# Altium PCB Main_Board.PcbDoc (part 11 of 14)
Units mm, origin at the board's own origin, x right, y up, seen from the top; angles counter-clockwise.
Board outline 142 x 82 mm, 10 copper layers (L1_Top, L2_PWR1, L3_Sig1, L4_GND1, L5_Sig2, L6_Sig3, L7_GND2, L8_Sig4, L9_GND3, L8_Bottom), stack 1.71 mm thick; 299 components, 328 nets, 2329 pads, 2908 vias.
Unrouted connection lines stored in the file: 2.
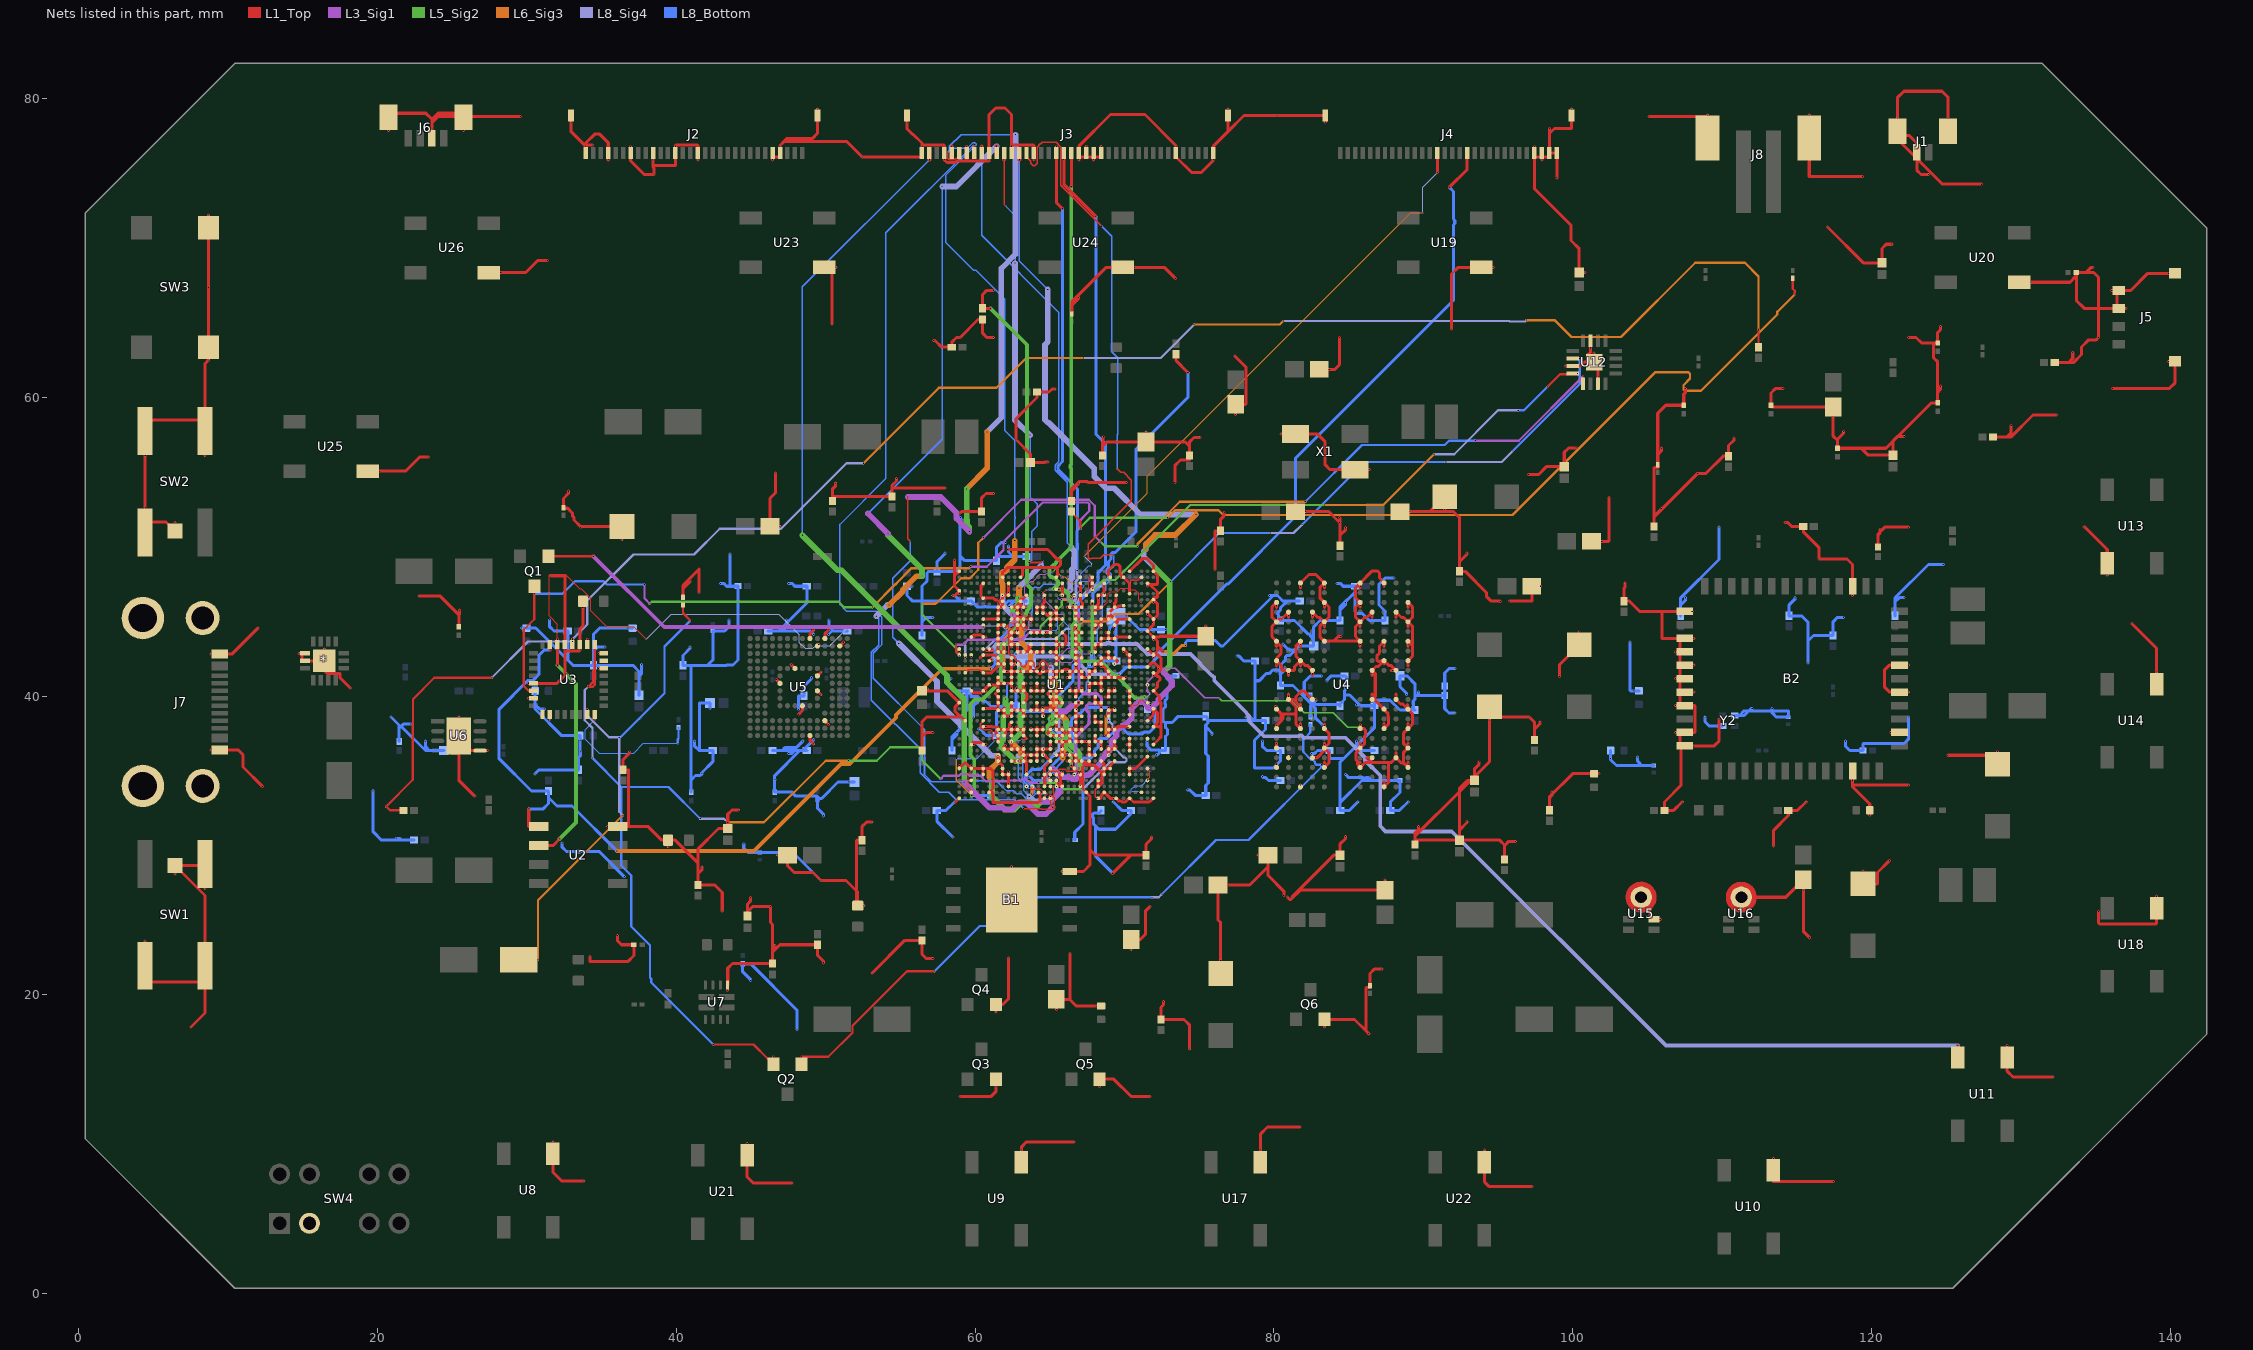
[diagram p18: the nets of this part, all layers, seen from the top]

## Via types
v1: diameter 0.1, hole 0.08, L1_Top to L8_Bottom, 1169 vias
v2: diameter 0.01, hole 0.01, L3_Sig1 to L8_Sig4, 433 vias
v3: diameter 0.01, hole 0.01, L8_Sig4 to L8_Bottom, 375 vias
v4: diameter 0.01, hole 0.01, L1_Top to L3_Sig1, 355 vias
v5: diameter 0.254, hole 0.01, L1_Top to L8_Bottom, 150 vias
v6: diameter 0.01, hole 0.01, L6_Sig3 to L8_Bottom, 129 vias
v7: diameter 0.05, hole 0.04, L1_Top to L8_Bottom, 104 vias
v8: diameter 0.01, hole 0.01, L1_Top to L5_Sig2, 89 vias
v9: diameter 0.01, hole 0.01, L1_Top to L8_Bottom, 41 vias
v10: diameter 0.1, hole 0.08, L1_Top to L3_Sig1, 17 vias
v11: diameter 0.1, hole 0.08, L1_Top to L5_Sig2, 11 vias
v12: diameter 0.1, hole 0.08, L8_Sig4 to L8_Bottom, 10 vias
v13: diameter 0.1, hole 0.08, L6_Sig3 to L8_Bottom, 9 vias
v14: diameter 1.27, hole 0.711, L1_Top to L8_Bottom, 8 vias
v15: diameter 0.4, hole 0.2, L1_Top to L8_Bottom, 4 vias
v16: diameter 0.05, hole 0.08, L1_Top to L8_Bottom, 3 vias
v17: diameter 0.05, hole 0.08, L6_Sig3 to L8_Bottom, 1 vias

## Nets (pads, with @x,y where several pads share a name; then routed paths per layer and width w, separated by ;. In a path a pad name is that pad's centre, name@x,y a point inside that pad or via, vN(x,y) a via of type N, cw(c..) or ccw(c..) an arc to the next point about the centre after c; other vN are vias at no path point) (continued)
GND: (continued)
  L1_Top w0.203: U4.E5@85.801,36.539 86.076,36.814 86.076,37.299 86.123,37.345 86.123,37.719 86.022,37.82 85.826,37.82 U4.G5@85.804,37.842 ; 86.264,35.552 87.651,35.552 ; U4.K4@86.58,39.768 86.788,39.976 86.788,41.51 U4.N4@86.58,41.718 ; U4.N4@86.58,41.718 86.838,41.976 86.988,41.976 U4.P3@87.38,42.368 ; 87.651,35.552 87.864,35.552 U4.D2@88.18,35.868 ; U4.D2@88.18,35.868 88.517,35.531 88.667,35.531 ; 88.667,35.531 88.667,36.205 U4.E1@88.98,36.518 ; U4.E1@88.98,36.518 88.667,36.831 88.667,37.505 U4.G1@88.98,37.818 ; U4.G1@88.98,37.818 89.277,38.115 89.277,38.821 U4.J1@88.98,39.118 ; U4.V1@88.98,44.968 89.277,44.671 89.277,43.371 ; 90.441,52.349 92.027,52.349 92.441,51.935 92.441,49.001 ; C107.2@92.441,30.349 95.12,30.349 95.441,30.027 95.441,29.981 ; C107.2@92.441,30.349 92.441,31.038 ; 92.441,31.038 92.441,33.603 ; 92.441,33.603 C26.2@93.188,34.349 ; 92.441,33.603 92.441,33.837 92.953,34.349 C26.2@93.188,34.349 ; C26.2@93.188,34.349 94.441,35.603 v1(94.441,38.399) D15.1@94.441,39.274 95.116,38.6 v7(97.1,38.6) 97.441,38.259 97.441,37.771 ; J4.27@97.441,76.09 J4.28@97.941,76.09 ; J4.28@97.941,76.09 98.441,76.09 J4.29@98.441,76.349 ; 105.441,51.998 105.441,55.262 105.48,55.3 105.7,55.3 R30.2@105.7,55.481 105.7,56.16 ; 105.987,45.661 105.987,43.861 B2.3@107.184,43.861 ; B2.10@107.184,37.561 107.184,36.661 B2.11@107.26,36.661 ; B2.10@107.184,37.561 B2.10@107.503,37.561 108.174,37.561 108.2,37.587 108.2,39.336 108.174,39.361 B2.8@107.503,39.361 B2.8@107.184,39.361 ; B2.8@107.184,39.361 B2.7@107.184,40.261 ; B2.7@107.184,40.261 B2.6@107.184,41.161 ; B2.6@107.184,41.161 B2.5@107.184,42.061 ; B2.5@107.184,42.061 B2.4@107.184,42.961 ; B2.4@107.184,42.961 B2.3@107.184,43.861 ; C46.2@117.735,56.586 119.323,56.586 ; 119.323,56.586 120.981,56.586 124.024,59.629 C37.2@124.441,59.629 124.441,60.334 ; 124.176,63.629 124.151,63.604 124.151,62.665 124.441,62.374 124.441,60.334 ; 133.195,62.318 133.518,62.318 134.063,62.863 134.063,63.365 134.517,63.819 135.019,63.819 v7(135.2,64) 135.2,65.949 ; 133.721,68.126 133.721,66.475 134.247,65.949 135.2,65.949 ; 133.721,68.126 C33.2@133.721,68.349 134.36,68.349 ; 134.36,68.349 134.882,68.349 135.2,68.032 135.2,65.949 ; 135.2,65.949 J5.3@136.445,65.949 ; J5.3@136.445,65.949 136.445,67.149 J5.4@136.566,67.149
  L1_Top w0.254: 112.101,26.529 114.272,26.529 114.941,27.198 115.015,27.198 115.441,27.624 C71.2@115.441,27.698
  L3_Sig1 w0.1: v3(71.733,40.137) 71.541,40.328 v4(71.541,40.749) 71.541,40.921 72.483,41.863 73.401,41.863 75.389,39.875 76.307,39.875 76.325,39.857 v8(76.37,39.857)
  L5_Sig2 w0.1: v8(76.37,39.857) 76.37,39.812 76.506,39.676 81.159,39.676 81.697,39.138 81.791,39.138 82.039,38.89 83.98,38.89 84.964,37.906 85.648,37.906 v1(85.814,38.072)
  L6_Sig3 w0.04: v2(71.736,39.359) 71.736,39.508 v2(71.741,39.514)
  L6_Sig3 w0.203: v1(61.941,41.974) v1(61.941,43.274) 61.941,43.822 62.265,44.145 62.265,44.512 62.08,44.697 v1(62.066,44.697) ; v1(68.766,37.349) v1(68.766,38.649) ; v9(72.591,42.971) 72.861,42.971 73.027,42.805 73.261,42.805 73.845,43.39 v6(74.08,43.39)
  L8_Sig4 w0.04: v3(71.412,39.539) 71.475,39.602 ; v2(71.541,34.371) 71.541,34.393 v3(71.564,34.416) ; v3(71.733,40.137) 71.537,39.941 71.537,39.664 71.475,39.602 ; v2(71.736,39.359) 71.741,39.365 v2(71.741,39.514) 71.654,39.602 71.475,39.602
  L8_Sig4 w0.203: v2(67.876,47.183) 68.066,47.374 v1(68.641,47.374)
  L8_Bottom w0.04: v4(62.095,37.025) 63.033,37.025 v4(63.13,37.122) ; v4(70.95,33.55) 70.875,33.625 70.506,33.625 70.457,33.674 70.457,33.744 70.71,33.998 71.146,33.998 v3(71.564,34.416)
  L8_Bottom w0.203: v7(19.706,33.66) 19.706,30.908 20.265,30.349 21.605,30.349 ; v7(20.9,38.6) 21.441,38.059 21.441,37.94 ; v1(21.232,30.472) 21.482,30.472 21.605,30.349 ; R55.2@21.441,36.958 21.441,37.831 ; v1(22.221,38.118) 21.728,38.118 21.441,37.831 ; C123.2@22.441,30.349 21.605,30.349 ; v1(23.194,36.974) 23.194,36.636 23.481,36.349 ; C124.2@24.441,36.349 23.481,36.349 ; v1(29.642,44.551) C129.2@29.967,44.551 30.584,44.551 33.077,42.058 33.081,42.062 ; v7(30.527,34.778) 30.806,35.058 C61.2@33.441,35.058 33.441,35.877 33.541,35.977 ; C7.2@30.541,40.349 30.541,39.428 ; v1(31.162,39.141) 30.828,39.141 30.541,39.428 ; v1(31.523,45.102) 31.523,44.636 31.81,44.349 C9.2@32.733,44.349 32.733,42.41 33.081,42.062 ; v1(32.359,30.162) 32.359,29.874 32.645,29.587 C14.2@33.441,29.587 34.841,29.587 v7(36.521,27.907) ; v1(33.6,36.268) 33.6,36.035 33.541,35.977 ; v1(35.226,43.268) 34.728,43.268 34.441,42.981 ; C128.2@37.079,44.551 v1(36.754,44.551) 34.87,44.551 34.441,44.122 34.441,42.981 ; C16.2@37.506,40.05 37.506,41.312 ; v1(37.664,42.11) 37.664,41.471 37.506,41.312 ; v1(40.915,43.268) 40.915,43.193 40.441,42.719 C10.2@40.441,42.058 40.967,42.058 ; C18.2@40.996,33.56 40.996,34.386 ; v1(41.231,36.974) 41.231,36.636 41.518,36.349 41.537,36.349 ; 41.685,34.846 42.441,35.603 C121.2@42.441,36.349 41.537,36.349 ; v1(41.728,34.803) 41.598,34.673 41.283,34.673 40.996,34.386 ; v1(42.262,39.153) C21.2@42.262,39.534 41.537,39.534 41.537,36.349 ; v1(42.957,47.541) 43.173,47.541 43.364,47.349 43.633,47.349 ; v1(43.524,45.102) 43.524,44.636 43.237,44.349 C6.2@42.441,44.349 42.441,42.41 42.089,42.058 ; v7(43.608,49.497) 43.608,47.375 43.633,47.349 ; v1(44.514,30.093) 44.514,29.804 44.801,29.518 C15.2@45.597,29.518 47.813,29.518 v7(49.678,27.653) ; v1(44.979,20.956) 44.979,20.999 44.441,21.537 C131.2@44.441,22.069 44.979,22.069 48.078,18.97 v7(48.078,17.67) ; C20.2@46.15,44.349 47.073,44.349 ; R67.1@46.441,36.349 47.076,36.349 ; v1(46.605,34.409) 46.605,34.372 46.584,34.351 ; 46.862,44.349 48.733,46.22 C3.2@48.733,47.349 47.93,47.349 47.739,47.541 v1(47.523,47.541) ; v1(47.36,45.102) 47.36,44.636 47.073,44.349 ; v1(47.523,36.162) 47.741,36.162 47.928,36.349 ; v1(48.18,39.083) 48.18,39.99 48.205,40.015 R18.2@48.555,40.015 48.555,40.669 49.043,41.158 v1(49.043,41.225) ; v1(48.462,36.974) 48.056,36.569 47.295,36.569 47.076,36.349 ; R16.2@48.733,36.349 R16.2@48.469,36.349 ; v1(49.196,37.076) R16.2@48.469,36.349 ; v1(49.196,44.112) 48.958,44.349 47.073,44.349 ; v1(49.856,31.985) 49.856,32.09 49.441,32.504 R21.2@49.441,33.095 R21.2@49.441,33.139 ; v1(50.186,44.112) 50.424,44.349 50.52,44.349 ; v1(50.234,45.102) 50.234,44.636 50.52,44.349 ; R66.2@51.441,44.349 50.52,44.349 ; C22.2@51.918,34.239 v1(51.537,34.239) 50.829,34.239 49.729,33.139 R21.2@49.441,33.139 ; v1(55.766,47.349) C2.2@55.441,47.349 55.441,46.733 55.825,46.349 56.441,46.349 ; C125.2@56.441,44.058 56.441,44.981 ; v1(57.171,45.268) 56.728,45.268 56.441,44.981 ; v1(57.984,49.559) 57.984,49.519 57.441,48.976 C54.2@57.441,48.349 ; v1(58.38,41.187) 58.231,41.038 58.231,40.636 58.518,40.349 C67.2@59.441,40.349 ; C79.2@58.441,36.349 58.441,37.07 ; v7(58.517,30.548) 57.441,31.624 R46.2@57.441,32.349 58.059,32.349 58.62,32.91 v1(58.651,32.91) ; v1(58.523,46.728) 58.645,46.728 59.024,46.349 ; v1(58.797,37.559) 58.797,37.425 58.441,37.07 ; 59,51.62 59,51.788 ; 59.001,51.619 59,51.617 59,49.375 ; v7(59.017,51.952) 59.017,51.805 59,51.788 ; v7(59.176,51.794) 59.17,51.788 59,51.788 ; v1(59.897,38.6) 59.897,39.349 60.303,39.755 60.393,39.755 ; v1(60.231,37.787) 60.324,37.787 60.762,37.349 C69.2@61.441,37.349 61.441,38.933 61.81,39.301 ; v1(62.048,50.268) 61.728,50.268 61.441,49.981 61.441,49.349 ; v1(62.231,50.033) 62.231,49.801 62.231,49.636 62.518,49.349 ; v1(62.281,45.996) 62.281,46.002 62.628,46.349 ; v1(62.781,40.524) 62.733,40.476 C31.2@62.733,39.349 ; v1@63.441,41.649 C64.2@63.441,42.349 ; C99.2@63.441,46.349 62.723,46.349 62.628,46.349 ; R4.1@63.441,49.349 62.518,49.349 ; v1(63.555,34.565) 63.709,34.565 63.711,34.566 63.928,34.349 C70.2@64.733,34.349 64.733,34.688 65.026,34.981 65.026,35.216 65.895,36.086 66.166,36.086 66.489,36.086 66.657,36.254 66.657,36.259 66.68,36.281 66.68,36.719 66.617,36.782 66.617,37.219 66.487,37.349 C68.2@66.441,37.349 ; v1(65.315,37.787) 65.324,37.787 65.574,37.537 ; v1(65.441,37.924) 65.632,37.734 65.632,37.595 65.758,37.469 65.758,37.448 65.875,37.33 66.423,37.33 C68.2@66.441,37.349 ; C65.2@65.441,39.349 65.441,38.914 ; 66.441,37.924 66.441,38.41 66.854,38.822 67.018,38.822 67.431,39.235 68.916,39.235 68.941,39.21 R40.2@68.941,38.904 ; v1(66.486,37.899) 66.456,37.899 v1@66.441,37.914 ; v1(68.304,42.664) 68.386,42.664 68.701,42.349 C66.2@69.441,42.349 69.441,43.401 69.439,43.403 69.439,44.618 69.441,44.62 C63.2@69.441,45.001 ; C59.2@68.441,32.349 68.441,32.304 68.312,32.174 68.077,32.174 68.063,32.159 67.946,32.159 67.846,32.059 67.846,31.917 67.941,31.821 67.941,31.424 68.068,31.297 ; v7(69.008,44.417) 69.008,44.567 C63.2@69.441,45.001 ; v7(69.211,28.135) 68.068,29.278 68.068,31.297 ; v1(69.231,32.91) 69.263,32.91 69.824,32.349 C109.2@70.441,32.349 70.441,32.123 69.4,31.081 68.284,31.081 68.068,31.297 ; v1(70.119,45.349) v1@70.107,45.349 ; v1(71.523,36.974) 71.523,36.636 71.76,36.399 72.295,36.399 72.345,36.349 ; v7(72.132,36.067) 72.201,36.067 72.345,36.211 72.345,36.349 ; v1(72.282,41.851) 72.342,41.851 72.804,41.389 72.844,41.349 ; v1(72.766,44.449) C1.2@72.441,44.449 71.007,44.449 v1@70.107,45.349 ; R11.2@73.441,41.349 72.844,41.349 ; v6(74.08,43.39) 74.085,43.395 74.085,43.584 74.232,43.731 76.063,43.731 76.441,43.353 76.599,43.353 79.975,46.728 ; v1(74.232,33.723) 74.356,33.723 74.73,33.349 C108.2@75.441,33.349 75.441,34.006 75.608,34.172 75.608,35.98 75.441,36.146 75.441,37.955 ; v1(75.866,37.431) 75.866,37.53 75.441,37.955 ; v1(77.523,42.664) 77.677,42.664 77.992,42.349 C87.2@78.733,42.349 78.733,41.14 ; v1(78.142,38.595) 78.147,38.6 78.418,38.6 78.669,38.349 ; v1(79.232,34.617) 79.312,34.536 79.45,34.536 79.637,34.349 C119.2@80.441,34.349 ; v1(79.232,36.974) 79.232,36.636 79.518,36.349 C104.2@80.441,36.349 80.441,35.657 79.955,35.171 78.736,35.171 78.71,35.196 78.71,37.031 79.441,37.762 C102.2@79.441,38.349 78.761,38.349 ; v1(79.71,46.728) 79.975,46.728 ; 80.429,41.451 80.429,41.601 80.283,41.747 79.933,41.747 79.683,41.496 79.477,41.496 79.249,41.268 79.249,41.249 79.02,41.021 78.852,41.021 78.733,41.14 ; C88.2@80.441,40.704 81.278,40.704 82.036,39.945 ; C88.2@80.441,40.711 80.441,41.451 80.742,41.752 v1(80.742,41.913) ; 80.441,41.601 80.441,42.083 80.794,42.435 80.794,42.639 80.877,42.722 81.081,42.722 81.43,43.071 ; v1(80.604,43.468) 80.612,43.468 80.936,43.145 81.032,43.145 81.106,43.071 81.43,43.071 ; C118.2@81.733,46.349 80.888,46.349 ; R39.2@82.441,38.604 82.441,39.14 82.441,39.337 82.538,39.433 ; C80.1@82.441,40.069 82.441,39.809 82.441,39.54 ; v1(82.523,36.162) 82.741,36.162 82.929,36.349 C101.2@83.733,36.349 83.733,35.857 83.758,35.831 84.695,35.831 ; 82.836,39.732 82.678,39.573 ; v1(83.181,41.339) 82.441,41.339 82.036,40.933 82.036,39.945 ; v1(83.257,38.067) 82.775,38.549 82.775,39.196 82.538,39.433 ; v1(83.547,41.014) 83.547,41.054 83.842,41.349 84.454,41.349 84.745,41.349 84.874,41.219 84.874,40.701 84.77,40.596 ; v1(84.231,47.541) 84.447,47.541 84.639,47.349 C116.2@85.441,47.349 85.441,46.966 ; C103.2@84.4,39.438 82.812,39.438 82.678,39.573 ; C103.2@84.441,39.349 84.441,39.438 84.441,39.48 84.733,39.771 84.733,40.073 ; v1(84.804,34.742) 85.011,34.536 85.974,34.536 86.007,34.504 86.149,34.504 86.181,34.536 86.328,34.536 86.515,34.349 ; v1(84.806,40.559) 84.806,40.43 84.733,40.356 84.733,40.073 ; v1(84.806,46.268) 84.806,46.138 84.441,45.773 ; v1(85.523,36.974) 85.523,36.659 ; v1(85.523,39.413) 85.733,39.413 ; v1(85.643,32.902) 85.612,32.902 85.059,32.349 C112.2@84.441,32.349 84.441,32.885 ; C100.2@86.733,36.349 86.34,36.349 85.81,36.349 85.523,36.636 85.523,36.659 ; v1(88.058,47.893) 87.441,47.893 87.036,47.488 87.036,46.1 87.441,45.694 C84.2@87.441,45.058 86.39,45.058 85.924,45.525 85.56,45.525 85.441,45.644 85.441,46.966 ; v1(88.87,40.102) 88.87,40.2 88.441,40.629 C115.2@88.441,41.349 88.915,41.349 89.441,40.822 89.441,39.921 ; v1(89.006,32.91) 88.974,32.91 88.413,32.349 R1.2@87.796,32.349 87.796,32.9 88.441,33.545 C4.2@88.441,34.349 87.174,34.349 86.515,34.349 ; v1(89.683,40.268) 89.683,40.077 89.642,40.036 ; v1(92.122,38.865) 91.728,38.865 91.441,39.151 91.441,39.565 C12.1@91.441,40.036 ; v1(92.122,41.834) 91.728,41.834 91.441,41.547 C12.2@91.441,40.663 C12.1@91.441,40.036 ; C5.2@102.541,36.349 102.541,36.024 v1(102.541,35.827) 102.541,35.742 102.935,35.349 104.645,35.349 ; v7(103.856,43.629) 103.856,40.375 103.882,40.349 v1(104.116,40.349) C13.2@104.441,40.349 ; v1(104.359,35.925) 104.359,35.636 104.645,35.349 ; C126.2@105.441,35.349 104.645,35.349 ; C151.2@107.238,45.37 107.238,46.105 ; v1(107.565,46.58) 107.565,46.432 107.238,46.105 ; v1(108.859,38.6) 108.859,38.286 109.145,37.999 Y2.4@110.041,37.999 ; v7(109.8,51.3) 109.8,49.138 107.238,46.576 107.238,46.105 ; v1(112.024,39.162) 111.944,39.162 111.481,38.699 Y2.2@110.841,38.699 111.169,38.699 111.476,39.006 114.416,39.006 114.441,38.981 C127.2@114.441,38.587 113.645,38.587 113.359,38.874 v1(113.359,39.162) ; v1(114.88,46.58) 114.88,46.47 114.477,46.067 C150.2@114.477,45.37 115.323,45.37 115.744,44.95 115.744,43.68 ; v7(115.744,42.207) 115.744,43.68 ; v1(118.131,45.268) 117.728,45.268 117.441,44.981 C149.2@117.441,44.058 116.121,44.058 115.744,43.68 ; v1(118.27,36.974) 118.27,36.636 118.557,36.349 C130.2@119.441,36.349 119.441,36.797 119.467,36.822 122.182,36.822 122.5,37.139 v7(122.5,38.6) ; C122.2@121.589,45.37 121.589,46.293 ; v1(122.195,46.58) 121.876,46.58 121.589,46.293 ; v7(124.811,48.811) 123.824,48.811 121.589,46.576 121.589,46.293 ; 21.441,37.831 21.441,37.94 ; 21.441,37.94 21.467,37.965 21.586,37.965 23.202,36.349 23.481,36.349 ; 30.541,39.428 30.541,39.133 32.326,37.349 C8.2@33.541,37.349 33.541,35.977 ; 33.081,42.062 33.085,42.058 C19.2@34.441,42.058 ; C19.2@34.441,42.058 34.441,42.981 ; C19.2@34.441,42.058 37.092,42.058 37.506,41.644 37.506,41.312 ; 40.967,42.058 42.089,42.058 ; 40.967,42.058 40.996,42.029 40.996,34.386 ; 42.089,42.058 43.344,42.058 43.36,42.074 43.792,42.074 44.128,42.41 C11.2@44.128,47.349 43.633,47.349 ; 46.584,34.351 46.584,34.663 48.27,36.349 ; 46.584,34.351 C17.2@46.584,33.56 47.733,33.56 48.002,33.291 49.429,33.291 49.441,33.279 R21.2@49.441,33.139 ; 47.076,36.349 47.928,36.349 ; 47.928,36.349 48.27,36.349 ; 48.27,36.349 R16.2@48.469,36.349 ; 56.441,44.981 56.441,46.349 ; 56.441,46.349 56.441,47.359 56.774,47.692 56.774,48.23 56.893,48.349 C54.2@57.441,48.349 ; 56.441,46.349 59.024,46.349 ; C54.2@57.441,48.349 58.682,48.349 59,48.667 59,49.375 ; 58.441,37.07 58.441,37.254 59,37.812 v7(59,38.6) 59.441,39.041 C67.2@59.441,40.349 ; 59,49.375 59.317,49.058 C23.2@61.441,49.058 61.441,49.349 ; 59.024,46.349 C120.2@59.733,46.349 59.778,46.349 60.043,46.085 60.043,46.067 60.145,45.966 60.626,45.966 60.649,45.989 60.754,45.989 60.777,45.966 61.817,45.966 62.2,46.349 62.628,46.349 ; C67.2@59.441,40.349 59.724,40.349 59.737,40.336 59.737,39.997 59.762,39.972 60.176,39.972 60.393,39.755 ; 60.393,39.755 60.438,39.755 60.556,39.637 60.73,39.637 61.066,39.301 61.541,39.301 61.81,39.301 ; 61.441,49.349 62.518,49.349 ; 61.81,39.301 61.857,39.349 62.097,39.349 C31.2@62.733,39.349 ; C31.2@62.733,39.349 62.733,39.006 62.758,38.981 65.375,38.981 65.441,38.914 ; 65.441,38.914 66.436,37.919 v1@66.441,37.914 ; C68.2@66.441,37.349 v1@66.441,37.914 ; C63.2@69.441,45.001 C63.2@69.441,45.349 v1@70.107,45.349 ; 72.345,36.349 C110.2@72.733,36.349 72.733,37.289 72.874,37.431 72.874,37.759 72.733,37.901 72.733,38.23 ; 72.733,38.23 73.19,38.23 73.601,38.641 C111.2@75.441,38.641 75.544,38.538 75.544,38.349 ; 72.733,38.23 72.674,38.23 72.591,38.313 72.591,39.124 72.733,39.266 72.733,39.457 72.703,39.487 72.703,39.678 72.844,39.82 72.844,40.303 73.057,40.515 73.057,40.998 72.974,41.081 72.91,41.081 72.844,41.146 72.844,41.349 ; 75.441,37.955 75.441,38.051 75.583,38.193 75.583,38.31 75.544,38.349 ; 75.544,38.349 78.669,38.349 ; 78.669,38.349 78.761,38.349 ; 78.733,41.14 78.733,38.378 78.761,38.349 ; 79.975,46.728 80.239,46.728 80.618,46.349 80.888,46.349 ; 80.888,46.349 80.441,45.902 80.441,45.755 80.292,45.606 80.292,45.456 80.312,45.436 80.312,45.188 C86.2@80.441,45.058 81.377,45.058 82.27,44.166 82.368,44.166 82.451,44.083 82.451,43.985 82.663,43.772 ; 81.43,43.071 81.708,43.349 81.99,43.349 C83.2@82.663,43.349 82.663,43.772 ; 82.036,39.945 82.441,39.54 ; 82.441,39.54 82.441,39.53 82.538,39.433 ; 82.538,39.433 82.678,39.573 ; 82.663,43.772 82.663,44.632 83.089,45.058 C85.2@84.441,45.058 84.441,45.773 ; 84.441,32.885 84.441,35.577 84.695,35.831 ; 84.441,32.885 85.906,34.349 86.515,34.349 ; 84.441,45.773 84.441,45.966 85.441,46.966 ; 84.695,35.831 85.523,36.659 ; 84.733,40.073 85.073,40.073 85.733,39.413 ; 85.523,36.659 86.733,37.869 C77.2@86.733,39.349 ; 85.733,39.413 85.803,39.413 85.866,39.349 C77.2@86.733,39.349 ; C77.2@86.733,39.349 86.733,39.692 86.758,39.718 87.779,39.718 88.439,39.058 C78.2@89.441,39.058 89.335,39.164 89.335,39.456 89.331,39.459 89.331,39.665 89.441,39.775 89.441,39.835 89.441,39.921 ; 89.441,39.921 89.556,40.036 89.642,40.036 ; 89.642,40.036 C12.1@91.441,40.036
  other v1: 63.441,33.945 33.541,37.024 62.764,42.233 71.885,44.918
  other v2: 70.95,33.55 62.095,37.025 63.13,37.122 71.733,40.137 71.148,46.284
  other v3: 70.95,33.55 62.095,37.025 63.13,37.122
  other v4: 71.541,34.371 71.736,39.359 67.876,47.183
GPIOD_5/IR_IN: U1.B13
GPIOD_7: J4.14 U1.E12 | length 42
  L1_Top w0.04: U1.E12@67.441,46.749 67.482,46.789 67.482,46.956 67.606,47.081 67.606,47.991 v2(67.706,48.091)
  L1_Top w0.203: v1(90.941,75.035) J4.14@90.941,76.349
  L6_Sig3 w0.04: v6(67.291,49.349) 71.531,53.589 71.531,54.706 89.162,72.336 v6(89.969,72.336)
  L8_Sig4 w0.04: v6(67.291,49.349) 67.799,48.842 v3(67.799,48.709) ; v6(89.969,72.336) 89.969,72.972 89.968,72.973 89.968,74.062 v1(90.941,75.035)
  L8_Bottom w0.04: v2(67.706,48.091) 67.706,47.708 67.683,47.684 67.1,47.684 67.076,47.708 67.076,48.191 67.595,48.709 v3(67.799,48.709)
  other v3: 67.706,48.091
  other v4: 67.706,48.091
GPIOH_0: J4.18 U1.R28 | length 55
  L1_Top w0.203: U1.R28@60.941,42.349 61.032,42.44 v1(61.134,42.44) ; v1(91.745,74.054) 92.941,75.251 J4.18@92.941,76.349
  L8_Sig4 w0.254: v1(61.134,42.44) 61.332,42.639 66.5,42.639 67.687,41.452 v12(69.643,41.452)
  L8_Bottom w0.203: v12(69.643,41.452) 70.118,41.927 71.537,41.927 72.335,42.725 72.335,42.986 76.848,47.499 76.941,47.499 81.454,52.012 81.454,55.923 92.02,66.489 92.02,71.538 92.11,71.628 92.11,71.834 92.02,71.924 92.02,73.779 v1(91.745,74.054)
GPIOT_18: U1.N28 U11.4 | length 79.5
  L1_Top w0.203: U1.N28@60.941,43.149 v1(61.134,43.149) ; U11.4@125.791,15.799 125.791,16.593 v1(125.802,16.604)
  L8_Sig4 w0.254: v1(61.134,43.149) 61.461,43.477 68.757,43.477 68.828,43.548 69.055,43.548 69.126,43.477 70.848,43.477 71.52,42.805 74.414,42.805 75.861,41.358 75.89,41.358 76.017,41.231 76.017,41.026 78.191,38.853 78.191,38.825 78.339,38.677 78.339,38.306 79.335,37.31 81.643,37.31 81.698,37.365 81.862,37.365 82.024,37.203 84.793,37.203 86.103,35.892 86.103,35.686 87.118,34.672 87.118,31.297 87.476,30.94 91.908,30.94 106.244,16.604 v1(125.802,16.604)
HOST_WAKE_BT: R51.1 R53.2 U1.D17 | length 26.4
  L1_Top w0.203: U1.D17@65.441,47.149 65.589,47.149 v11(65.604,47.134)
  L5_Sig2 w0.254: v11(65.604,47.134) 65.926,47.134 66.059,47.002 66.08,47.002 66.178,46.904 66.178,46.883 66.254,46.806 66.254,46.484 66.665,46.073 66.665,45.144 66.722,45.087 66.722,44.961 66.501,44.74 66.501,42.662 66.862,42.301 67.105,42.301 67.138,42.334 68.386,42.334 69.33,41.39 69.436,41.39 70.379,40.447 70.379,40.187 70.722,39.845 71.245,39.845 v1(71.336,39.936)
  L8_Bottom w0.203: R51.1@66.696,30.349 66.671,30.349 66.671,30.878 67.23,31.437 67.23,35.831 67.255,35.857 67.746,35.857 67.998,36.109 67.998,36.338 68.213,36.553 68.213,37.033 68.332,37.152 68.819,37.152 69.465,37.798 69.922,37.798 70.263,37.457 71.192,37.457 71.319,37.584 71.675,37.584 72.056,37.965 72.056,39.124 72.03,39.149 R53.2@71.541,39.149 71.541,39.199 71.384,39.356 71.384,39.388 71.286,39.487 71.286,39.886 v1(71.336,39.936)
HW_ID: R19.1 R25.2 U1.AE29 | length 47.7
  L1_Top w0.102: U1.AE29@60.541,38.349 60.541,38.309 60.346,38.113 60.346,37.868 60.465,37.749 61.018,37.749 61.161,37.607 61.161,37.135 v4(61.303,36.993)
  L1_Top w0.203: v11(61.032,65.952) R25.2@60.503,65.952 60.503,66.873 60.79,67.159 v1(61.235,67.159)
  L5_Sig2 w0.254: v1(59.779,33.341) 59.94,33.502 59.94,35.755 59.686,36.009 59.686,39.45 60.002,39.766 60.496,39.766 61.743,41.013 61.743,43.355 61.867,43.478 62.08,43.478 62.393,43.792 62.393,44.297 63.16,45.063 63.16,45.171 63.407,45.418 63.407,45.54 63.471,45.604 63.471,45.725 63.613,45.868 63.613,46.015 63.734,46.135 63.734,47.192 63.471,47.455 63.471,63.513 v11(61.032,65.952)
  L6_Sig3 w0.102: v6(58.744,35.813) 58.744,34.376 v1(59.779,33.341)
  L8_Bottom w0.102: v6(58.744,35.813) 60.123,35.813 v4(61.303,36.993)
  L8_Bottom w0.203: v1(59.779,33.341) 59.787,33.349 R19.1@61.066,33.349
  other v2: 61.303,36.993
  other v3: 61.303,36.993
I2CM_AO_SCL: R23.1 R77.2 U1.F11 U2.6 U3.30 | length 94.1
  L1_Top w0.04: v1(32.041,42.054) 32.041,44.794 31.477,45.358 31.477,48.082 31.56,48.165 32.566,48.165 33.541,47.19 33.619,47.19 34.267,46.542 34.267,45.702 35.327,44.641 37.133,44.641 v4(37.972,43.802)
  L1_Top w0.203: U2.6@30.791,29.984 31.741,29.984 v1(32.178,30.421) ; v1(32.041,42.054) U3.30@32.041,43.449 v1(32.041,43.799) ; v1(67.839,46.169) 67.841,46.171 v1(67.841,46.174) v1(67.841,46.223) U1.F11@67.841,46.349 ; R23.1@73.458,62.874 73.458,62.445 v1(74.24,61.663)
  L3_Sig1 w0.04: v3(66.965,42.691) 66.906,42.691 66.474,42.259 65.721,42.259 65.398,42.582 65.398,42.615 65.422,42.639 65.64,42.639 66.198,43.197 66.691,43.197 67.054,42.835 v1(67.799,42.835)
  L5_Sig2 w0.254: v1(32.041,42.054) 33.282,40.813 33.282,31.526 v1(32.178,30.421) ; v1(67.799,42.835) 67.799,42.853 67.839,42.893 v1(67.839,46.169)
  L8_Sig4 w0.04: v4(37.972,43.802) 39.66,45.49 46.846,45.49 47.531,44.804 47.551,44.804 48.236,44.118 48.236,43.565 48.618,43.183 49.148,43.183 49.317,43.352 50.258,43.352 51.615,44.71 61.779,44.71 61.985,44.505 62.408,44.505 62.453,44.46 62.876,44.46 62.879,44.456 63.195,44.456 ; 63.195,44.457 63.732,44.457 63.777,44.412 v3(65.041,44.412)
  L8_Bottom w0.04: v3(65.041,44.412) 65.429,44.412 65.527,44.51 65.527,45.164 65.604,45.24 65.679,45.24 66.28,44.639 66.28,43.292 66.882,42.691 v3(66.965,42.691)
  L8_Bottom w0.203: R77.2@67.641,42.158 67.671,42.188 67.671,42.233 67.799,42.361 v1(67.799,42.835) ; v1(67.841,46.223) 67.89,46.271 67.89,46.882 68.941,47.932 68.941,48.092 68.832,48.201 68.832,48.497 68.941,48.606 68.941,48.646 68.944,48.649 68.944,49.007 69.104,49.168 69.104,49.365 69.093,49.376 69.093,49.514 69.19,49.611 69.39,49.611 70.76,50.982 70.76,56.507 74.24,59.987 v1(74.24,61.663)
  other v2: 66.965,42.691 37.972,43.802
I2CM_AO_SDA: R20.1 R78.2 U1.E14 U2.5 U3.31 | length 72.9
  L1_Top w0.04: v4(62.138,44.46) 62.256,44.577 62.256,44.797 62.377,44.918 62.964,44.918 63.076,44.806 63.076,44.63 63.301,44.405 63.418,44.405 63.563,44.55 63.563,44.804 63.708,44.949 63.775,44.949 63.906,45.081 63.906,45.218 63.74,45.384 63.173,45.384 63.076,45.481 63.076,45.674 v4(63.14,45.738) ; 66.583,46.531 66.603,46.531 ; v9(66.603,46.51) 66.603,46.531 ; U1.E14@66.641,46.749 66.603,46.711 66.603,46.531
  L1_Top w0.203: v1(30.12,32.428) 30.12,31.267 30.133,31.254 U2.5@30.791,31.254 ; U3.31@31.541,43.449 v1(31.543,43.096) v1(31.543,43.096)
  L3_Sig1 w0.04: v4(63.14,45.738) 63.14,45.898 63.338,46.096 63.338,47.307 63.715,47.684 63.879,47.684 64.34,48.146 64.736,48.146 64.857,48.267 65.162,48.267 v8(65.191,48.296) ; v8(65.573,46.678) 65.573,46.507 65.597,46.483 65.768,46.483 65.816,46.531 66.706,46.531 66.751,46.576 66.751,46.609 66.637,46.723 v2(66.626,46.723)
  L5_Sig2 w0.04: v8(65.191,48.296) 65.276,48.381 65.313,48.381 65.339,48.407 65.339,48.444 65.453,48.558 65.486,48.558 65.509,48.535 65.509,48.282 v2(65.767,48.024) ; v8(65.573,46.678) 65.73,46.835 v2(66.011,46.835)
  L6_Sig3 w0.04: v2(65.767,48.024) 65.798,47.993 65.996,47.993 66.385,47.604 v6(66.626,47.604) ; v2(66.011,46.835) 66.278,46.835 v9(66.603,46.51)
  L6_Sig3 w0.254: v13(36.013,29.634) 45.208,29.634 51.024,35.45 51.605,35.45 54.705,38.549 54.705,38.727 57.804,41.826 v13(61.037,41.826)
  L8_Bottom w0.04: v2(66.626,46.723) 66.773,46.869 66.844,46.869 67.307,47.331 67.307,47.406 67.254,47.459 67.179,47.459 67.042,47.321 66.91,47.321 v6(66.626,47.604)
  L8_Bottom w0.203: v1(30.12,32.428) 31.06,32.428 31.441,32.809 31.441,33.202 ; v1(31.543,43.096) 31.174,43.096 30.806,42.727 30.806,41.434 30.393,41.021 30.038,41.021 28.139,39.121 28.139,35.8 30.298,33.641 R20.1@31.441,33.641 31.441,33.202 ; v13(36.013,29.634) 33.016,32.631 32.012,32.631 31.441,33.202 ; v13(61.037,41.826) 61.057,41.826 61.337,42.105 61.337,43.477 62.138,44.278 v4(62.138,44.46) 62.138,44.526 62.26,44.648 62.277,44.648 62.441,44.812 R78.2@62.441,44.858
  other v2: 62.138,44.46
  other v3: 62.138,44.46 66.626,46.723
I2S_LRCLK1: U1.N29 U12.14 | length 50.4
  L1_Top w0.04: U1.N29@60.541,43.149 60.561,43.149 60.726,42.984 61.262,42.984 61.337,43.059
  L1_Top w0.152: U1.N29@60.541,43.149 v1(60.716,43.149) ; U12.14@100.006,62.599 v1(100.476,62.599)
  L6_Sig3 w0.152: v6(66.792,44.524) 67.279,45.011 68.867,45.011 69.351,45.495 70.938,45.495 v6(73.095,47.652)
  L8_Sig4 w0.152: v1(60.716,43.149) 61.38,43.812 65.395,43.812 66.084,44.501 66.769,44.501 v6(66.792,44.524) ; v3(79.761,50.908) 81.323,50.908 v3(81.884,51.469) ; v3(91.509,55.671) 95.26,55.671 v3(95.997,56.408)
  L8_Bottom w0.152: v6(73.095,47.652) 76.351,50.908 v3(79.761,50.908) ; v3(81.884,51.469) 86.086,55.671 v3(91.509,55.671) ; v3(95.997,56.408) 100.476,60.887 v1(100.476,62.599)
I2S_MCLK1: U1.P32 | length 1
  L1_Top w0.152: v1(59.341,42.593) U1.P32@59.341,42.749
  L8_Sig4 w0.152: v6(59.268,43.45) 59.341,43.377 v1(59.341,42.593)
I2S_SCLK1: U1.P33 U12.16 | length 50.7
  L1_Top w0.152: v4(58.729,43.439) 58.72,43.43 58.72,42.954 58.941,42.732 v1(58.941,42.674) ; v4(98.318,60.698) 99.16,61.54 99.948,61.54 U12.16@100.006,61.599 v1(100.33,61.599)
  L3_Sig1 w0.152: v4(58.729,43.439) 59.191,43.439 59.51,43.758 61.853,43.758 61.9,43.711 61.983,43.711 62.03,43.758 63.146,43.758 63.799,44.412 v8(64.379,44.412)
  L5_Sig2 w0.152: v8(64.379,44.412) 64.379,44.666 65.797,46.084 v2(65.797,46.449) ; v2(67.826,46.992) v2(67.826,46.992) 67.977,47.142 67.977,47.143 68.603,47.769 69.38,47.769 74.399,52.789 v2(83.391,52.789)
  L6_Sig3 w0.152: v2(65.797,46.449) 66.242,46.449 66.558,46.133 66.572,46.133 v6(66.572,46.127) ; v2(83.391,52.789) 87.318,52.789 v6(90.717,56.188)
  L8_Sig4 w0.152: v6(66.572,46.127) 66.679,46.127 66.928,46.375 66.928,46.479 67.441,46.992 v2(67.826,46.992) ; v6(90.717,56.188) 92.07,56.188 95.007,59.125 v3(96.36,59.125)
  L8_Bottom w0.152: v3(96.36,59.125) 96.745,59.125 v4(98.318,60.698)
  other v2: 98.318,60.698
  other v3: 98.318,60.698
I2S_SDI1: U1.P31 | length 0.1
  L1_Top w0.152: v1(59.741,42.64) U1.P31@59.741,42.749
I2S_SDO1: U1.N33 U12.1 | length 60.4
  L1_Top w0.152: U1.N33@58.941,43.149 58.943,43.148 v1(58.943,42.975) ; U12.1@100.691,60.914 v1(100.691,61.384)
  L3_Sig1 w0.152: v2(60.555,50.6) 63.089,53.134 67.617,53.134 68.013,52.738 68.013,50.699 v8(68.409,50.303) ; v2(93.489,57.092) 96.399,57.092 v1(100.691,61.384)
  L5_Sig2 w0.152: v2(56.441,46.171) 56.441,45.476 v1(58.943,42.975) ; v8(68.409,50.303) 68.693,50.019 v2(70.873,50.019)
  L6_Sig3 w0.152: v2(56.441,46.171) 57.34,46.171 57.408,46.239 57.433,46.239 59.079,47.885 59.653,47.885 60.213,48.445 60.213,50.258 v2(60.555,50.6) ; v2(70.873,50.019) 70.873,50.176 73.706,53.009 v6(82.104,53.009)
  L8_Bottom w0.152: v6(82.104,53.009) 85.901,56.806 91.434,56.806 91.72,57.092 v2(93.489,57.092)
  other v3: 93.489,57.092
LCD_BL_PWM: J3.21 U1.AM14 | length 45.9
  L1_Top w0.04: v4(64.438,46.947) 64.611,46.947 v4(64.761,47.097)
  L1_Top w0.203: v1(66.442,74.109) J3.21@66.441,76.349 ; v1(66.442,35.348) U1.AM14@66.641,35.149
  L3_Sig1 w0.04: v4(64.438,46.947) 64.551,46.834 64.551,46.515 65.579,45.487 v8(65.978,45.487)
  L5_Sig2 w0.04: 65.244,40.6 65.651,41.007 65.651,43.645 65.641,43.654 65.641,44.708 65.97,45.037 65.97,45.48 v8(65.978,45.487)
  L5_Sig2 w0.254: v2(65.238,47.165) 65.543,47.47 65.543,47.681 65.3,47.923 65.221,47.923 65.165,47.98 65.075,47.98 64.959,48.095 64.959,48.492 65.247,48.78 65.299,48.78 65.425,48.906 65.425,48.958 66.442,49.975 66.442,55.245 66.387,55.3 66.387,55.426 66.442,55.481 v1(66.442,74.109) ; 65.244,40.6 65.244,40.27 65.758,39.756 65.758,39.398 65.667,39.306 65.667,38.617 65.181,38.132 64.991,38.132 64.842,37.983 64.842,37.482 64.867,37.457 65.188,37.457 66.442,36.203 v1(66.442,35.348)
  L8_Sig4 w0.04: v3(65.087,47.103) 65.149,47.165 v2(65.238,47.165)
  L8_Bottom w0.04: v4(64.761,47.097) 65.081,47.097 v3(65.087,47.103)
  other v2: 64.761,47.097
  other v3: 64.761,47.097
LCD_EN: J3.19 U1.AN14 | length 46.1
  L1_Top w0.203: v1(65.441,76.799) 65.441,73.038 v4(65.857,72.622)
  L3_Sig1 w0.203: v2(66.499,45.912) 66.556,45.912 66.906,45.562 66.906,45.536 66.965,45.477 66.965,44.96 v8(66.97,44.954) ; v4(66.641,34.749) 66.768,34.876 66.768,37.293 67.638,38.163 67.638,38.853 67.47,39.021 67.47,39.349 67.589,39.468 68.296,39.468 68.469,39.64 68.469,39.846 68.163,40.152 67.271,40.152 66.965,40.458 v8(66.965,42.549)
  L5_Sig2 w0.203: v8(66.965,42.549) 67.002,42.549 67.091,42.638 67.091,43.082 66.97,43.203 66.97,44.078 ; 66.97,44.079 v8(66.97,44.954)
  L8_Sig4 w0.203: v2(66.499,45.912) 66.499,45.919 66.374,46.045 66.374,46.209 66.49,46.325 66.494,46.325 66.552,46.383 66.656,46.383 66.73,46.457 66.73,46.561 66.753,46.584 66.753,47.676 66.896,47.818 66.896,48.069 66.827,48.138 66.827,48.389 v3(66.837,48.399)
  L8_Bottom w0.203: v4(65.857,72.622) 65.857,55.704 65.542,55.389 65.542,55.183 66.863,53.863 66.863,51.069 66.837,51.044 66.837,50.207 66.839,50.205 66.839,49.812 66.837,49.81 v3(66.837,48.399)
  other v2: 65.857,72.622
  other v3: 65.857,72.622
LCD_RESET: J3.20 U1.AR21 | length 48.6
  L1_Top w0.203: J3.20@65.941,76.349 v1(65.941,75.899) 65.941,74.254 v4(68.079,72.116)
  L6_Sig3 w0.203: v6(63.777,33.441) 63.808,33.472 v9(63.808,33.915)
  L8_Sig4 w0.203: v3(65.146,39.799) 65.396,39.55 65.396,39.04 65.613,38.822 65.613,36.353 65.571,36.311 65.483,36.311 65.274,36.102 v3(65.274,36.014)
  L8_Bottom w0.203: v6(63.777,33.441) 63.954,33.618 63.954,33.847 63.847,33.954 63.563,34.238 63.332,34.469 63.332,34.657 63.458,34.783 63.51,34.783 63.822,35.096 64.374,35.096 64.852,35.574 64.852,35.592 v3(65.274,36.014) ; v3(65.146,39.799) 65.359,39.799 66.57,41.01 66.57,42.045 67.106,42.582 67.106,42.749 66.914,42.942 66.831,42.942 66.526,43.247 66.526,44.736 66.914,45.124 66.914,46.286 68.238,47.61 68.238,48.259 68.721,48.742 68.721,49.1 68.732,49.112 68.732,56.885 68.079,57.538 v4(68.079,72.116)
  other v2: 68.079,72.116
  other v3: 68.079,72.116
MCU_BOOT_CTRL: Q2.1 R39.1 | length 47.4
  L1_Top w0.152: Q2.1@48.391,15.349 v1(48.391,15.849) 50.177,15.849 51.788,17.459 51.788,17.931 55.438,21.582 v4(57.288,21.582)
  L8_Sig4 w0.152: v3(71.852,26.521) 72.292,26.521 v3(72.501,26.73)
  L8_Bottom w0.152: v4(57.288,21.582) 60.313,24.607 62.065,24.607 63.978,26.521 v3(71.852,26.521) ; v3(72.501,26.73) 76.125,30.354 78.302,30.354 83.181,35.232 v1(83.181,35.395) 82.839,35.395 82.755,35.479 82.755,35.585 82.599,35.741 82.493,35.741 81.997,36.237 81.997,36.257 81.974,36.28 81.974,37.091 82.061,37.178 82.441,37.559 R39.1@82.441,38.095
  other v2: 57.288,21.582
  other v3: 57.288,21.582
MCU_I2C2_SCL: U3.22 | length 0.3
  L1_Top w0.152: v1(34.791,41.849) U3.22@35.141,41.849
MCU_I2C2_SDA: U3.23
MCU_NMI: R31.1 U3.16 | length 9.9
  L1_Top w0.152: v1(34.541,38.399) U3.16@34.541,38.749
  L8_Bottom w0.05: v1(34.541,38.399) 33.888,37.746 33.888,37.12 34.836,36.173 37.137,36.173 37.788,36.824 v1(40.102,36.824)
  L8_Bottom w0.152: v1(40.102,36.824) 40.102,37.098 40.141,37.137 R31.1@40.141,37.898
MCU_PA0: U3.7 | length 0.3
  L1_Top w0.152: v1(30.091,39.849) U3.7@30.441,39.849
MCU_PA15: U3.26 | length 0.4
  L1_Top w0.152: U3.26@34.041,43.449 v1(34.041,43.799)
MCU_PWR_CTRL: D6.2 R34.1 U3.15 | length 33.2
  L1_Top w0.152: D6.2@29.441,22.349 v1(30.741,22.349) ; U3.15@34.041,38.749 v1(34.041,39.099) ; R34.1@40.441,46.095 40.441,45.552 40.915,45.078 v1(40.915,45.021)
  L6_Sig3 w0.152: v1(30.741,22.349) 30.741,26.33 v6(36.421,32.01)
  L8_Sig4 w0.152: v1(34.041,39.099) 34.041,38.692 35.499,37.235 v3(36.179,37.235) 36.179,32.252 v6(36.421,32.01)
  L8_Bottom w0.152: v3(36.179,37.235) 36.258,37.235 37.502,38.479 37.512,38.479 37.598,38.565 37.598,38.575 39.209,40.186 39.209,43.314 v1(40.915,45.021)
MCU_PWR_KEY: R26.2 R64.2 U3.28 | length 118.5
  L1_Top w0.152: R64.2@21.733,32.349 20.828,32.349 20.559,32.618 v1(20.559,32.593) 22.353,34.387 22.353,38.043 22.367,38.057 22.367,39.788 23.796,41.217 v4(27.643,41.217) ; v2(33.041,43.649) v1(33.041,43.799) ; R26.2@112.441,63.349 112.441,64.229 ; 112.442,64.229 v1(112.442,64.523)
  L6_Sig3 w0.152: v6(52.525,55.583) 57.569,60.627 61.414,60.627 63.421,62.634 v6(67.265,62.634) ; v6(74.668,64.878) 80.399,64.878 v6(80.63,65.109) ; v6(96.921,65.164) 98.786,65.164 99.919,64.031 103.243,64.031 108.21,68.998 111.534,68.998 112.442,68.091 v1(112.442,64.523)
  L8_Sig4 w0.152: v4(27.643,41.217) 30.075,43.649 v2(33.041,43.649) ; v1(33.041,43.799) 34.036,44.794 34.036,46.388 37.126,49.477 41.178,49.477 42.904,51.203 47.005,51.203 51.385,55.583 v6(52.525,55.583) ; v6(67.265,62.634) 72.424,62.634 v6(74.668,64.878) ; v6(80.63,65.109) 95.755,65.109 95.799,65.065 96.822,65.065 v6(96.921,65.164)
  other v2: 27.643,41.217
  other v4: 33.041,43.649
MCU_RST: C47.1 Q1.3 R27.1 U3.6 | length 111.6
  L1_Top w0.152: U3.6@30.441,40.349 30.107,40.349 29.79,40.667 29.79,44.442 30.491,45.143 v1(30.491,46.849) Q1.3@30.491,47.349 ; C47.1@66.441,52.349 66.441,52.304 67.051,51.694 v1(67.051,51.175) ; R27.1@114.739,67.973 114.739,67.263 114.88,67.122 v1(114.88,66.899)
  L3_Sig1 w0.152: v2(37.862,47.465) 37.862,46.541 v8(38.225,46.178) ; v2(59.711,48.658) 60.785,48.658 61.902,49.775 61.902,50.328 64.535,52.961 67.545,52.961 67.646,52.86 67.646,52.379 66.925,51.657 66.925,51.302 v1(67.051,51.175)
  L5_Sig2 w0.152: v8(38.225,46.178) 38.353,46.306 50.873,46.306 51.232,45.947 v2(53.13,45.947) ; v1(67.051,51.175) 67.051,51.302 67.685,51.935 v2(72.876,51.935)
  L6_Sig3 w0.152: v2(53.13,45.947) 54.674,47.491 54.689,47.491 54.749,47.55 54.749,47.566 55.744,48.561 59.614,48.561 v2(59.711,48.658) ; v2(72.876,51.935) 73.379,52.438 76.302,52.438 76.618,52.122 95.982,52.122 105.543,61.683 107.733,61.683 107.864,61.552 107.864,61.257 107.419,60.812 107.419,60.517 107.504,60.431 108.593,60.431 113.697,65.534 113.697,65.715 v1(114.88,66.899)
  L8_Bottom w0.152: v1(30.491,46.849) 32.386,46.849 33.225,47.688 35.12,47.688 35.343,47.465 v2(37.862,47.465)
  other v3: 37.862,47.465
MCU_RST_CTRL: Q1.1 U1.J29 | length 31.2
  L1_Top w0.152: Q1.1@31.441,49.349 v1(34.464,49.349) ; v1(60.541,44.62) U1.J29@60.541,44.749
  L3_Sig1 w0.254: v1(34.464,49.349) 39.193,44.62 v1(60.541,44.62)
MCU_SWCLK: Q2.2 R40.1 U3.25 | length 80.1
  L1_Top w0.152: U3.25@34.541,43.449 34.541,41.796 ; v4(42.471,16.676) 45.165,16.676 46.118,15.723 46.168,15.723 46.491,15.399 Q2.2@46.491,15.349 v1(46.491,15.849) ; 34.541,41.796 34.541,40.751 34.417,40.627 v1(34.099,40.627) 34.417,40.944 34.417,41.671 34.541,41.796
  L3_Sig1 w0.152: v8(57.706,34.441) 57.761,34.496 57.761,34.527 57.892,34.658 58.919,34.658 59.039,34.778 59.503,34.778 59.623,34.658 60.357,34.658 60.714,34.301 62.196,34.301 62.245,34.349 63.089,34.349 63.171,34.43 63.436,34.43 63.566,34.301 63.612,34.301 63.713,34.2 v8(64.259,34.2)
  L5_Sig2 w0.152: v2(51.513,35.673) 53.418,35.673 54.317,36.572 56.222,36.572 56.44,36.355 56.44,35.707 v8(57.706,34.441) ; v8(64.259,34.2) 65.334,34.2 65.773,33.761 67.217,33.761 v2(67.23,33.774)
  L6_Sig3 w0.152: v6(43.441,31.541) 45.863,31.541 49.995,35.673 v2(51.513,35.673)
  L8_Sig4 w0.152: v1(34.099,40.627) 33.869,40.396 33.869,38.381 34.386,37.864 v3(34.386,35.849) ; v3(41.602,31.79) 43.193,31.79 v6(43.441,31.541) ; v2(67.23,33.774) 69.024,35.568 70.037,35.568 70.131,35.662 70.131,35.794 70.037,35.888 69.957,35.888 69.281,36.564 69.281,37.102 69.296,37.117 69.296,37.656 69.195,37.757 69.195,38.095 v2(68.941,38.349)
  L8_Bottom w0.152: v3(34.386,35.849) 36.32,33.915 ; v3(41.602,31.79) 39.477,33.915 36.32,33.915 ; v4(42.471,16.676) 38.319,20.828 38.319,21.065 38.242,21.142 38.242,23.312 36.99,24.564 36.99,27.988 36.32,28.658 36.32,33.915
  other v2: 42.471,16.676
  other v3: 42.471,16.676 68.941,38.349
MCU_SWDIO: U3.24 | length 0.3
  L1_Top w0.152: v1(34.791,42.849) U3.24@35.141,42.849
MCU_USART2_RX: U3.10 | length 0.4
  L1_Top w0.152: v1(31.541,38.399) U3.10@31.541,38.749
MCU_USART2_TX: U3.9
MIPI_DSI_CLKN: J3.8 U1.AU19 | length 60
  L1_Top w0.102: J3.8@59.941,76.349 v1(59.941,76.929) ; U1.AU19@64.641,33.149 64.641,33.279 64.677,33.279 64.836,33.438 v1(64.836,33.45)
  L8_Bottom w0.102: v1(59.941,76.929) 54.023,71.01 54.023,54.56 50.948,51.485 50.948,46.118 51.38,45.687 53.348,45.687 53.768,45.267 53.768,43.451 53.18,42.864 53.18,41.194 56.613,37.761 56.613,34.739 57.09,34.262 59.216,34.262 59.287,34.332 61.413,34.332 62.099,33.647 62.581,33.647 62.785,33.444 63.122,33.444 63.42,33.146 63.728,33.146 63.836,33.254 63.836,33.256 63.987,33.407 63.989,33.407 64.031,33.45 v1(64.836,33.45)
MIPI_DSI_CLKP: J3.9 U1.AT19 | length 53.1
  L1_Top w0.102: v2(63.651,33.745) 63.778,33.745 64.405,33.745 64.601,33.549 U1.AT19@64.641,33.549
  L1_Top w0.254: J3.9@60.441,76.349 v1(60.441,76.799)
  L5_Sig2 w0.381: v9(62.033,39.787) 62.033,39.501 62.202,39.332 62.202,38.926 61.88,38.604 61.88,37.121 61.744,36.986 61.744,36.609 62.713,35.64 63.029,35.64 v9(63.241,35.852)
  L8_Sig4 w0.381: v3(66.361,47.08) 66.361,47.764 66.483,47.886 66.483,48.496 66.622,48.634 66.622,49.238 66.629,49.246 66.629,49.714 66.474,49.869 66.474,49.939 v3(66.434,49.98)
  L8_Bottom w0.102: v1(60.441,76.799) 60.441,70.84 65.604,65.677 65.604,55.694 65.37,55.46 65.37,55.112 66.171,54.311 66.171,50.243 v3(66.434,49.98) ; v9(62.033,39.787) 62.136,39.891 62.136,40.698 62.445,41.007 62.445,42.634 62.852,43.041 63.179,43.041 63.288,43.15 63.288,44.292 63.369,44.373 63.409,44.373 63.48,44.444 63.48,44.456 63.596,44.572 63.596,44.98 63.783,45.167 63.783,45.639 63.82,45.676 63.82,45.872 63.817,45.875 63.817,46.008 63.826,46.017 63.826,46.682 63.721,46.787 63.721,47.024 63.966,47.27 64.15,47.27 64.166,47.253 64.35,47.253 64.591,47.495 65.27,47.495 65.685,47.08 v3(66.361,47.08) ; v9(63.241,35.852) 63.179,35.79 63.179,34.748 63.159,34.729 63.159,34.398 63.491,34.066 ; 63.491,34.066 63.562,33.995 63.562,33.834 v2(63.651,33.745)
  other v3: 63.651,33.745
  other v4: 63.651,33.745
MIPI_DSI_D0N: J3.14 U1.AM18 | length 59.2
  L1_Top w0.254: J3.14@62.941,76.349 62.964,76.326 62.964,75.906 v1(62.971,75.899)
  L3_Sig1 w0.381: v1(65.209,35.157) 65.801,34.565 66.385,34.565 66.512,34.437 66.771,34.437 66.915,34.581 67.191,34.581 67.301,34.691 67.577,34.691 68.441,35.556 68.441,35.728 68.707,35.993 68.707,36.121 68.722,36.136 68.722,36.171 68.861,36.31 68.96,36.31 69.167,36.516 69.167,37.027 69.474,37.334 69.474,37.638 69.867,38.032 70.024,38.032 70.481,38.489 70.481,39.14 70.938,39.597 71.301,39.597 71.52,39.378 71.52,39.27 71.646,39.144 71.825,39.144 71.953,39.272 71.953,39.353 72.082,39.481 72.119,39.481 72.272,39.634 72.272,39.783 73.183,40.694 73.183,41.01 v8(72.591,41.602)
  L5_Sig2 w0.381: v2(71.941,48.692) 73.027,47.606 73.027,42.007 72.622,41.602 v8(72.591,41.602)
  L6_Sig3 w0.381: v6(71.434,49.83) 71.434,50.175 72.035,50.776 73.403,50.776 v6(74.778,52.151)
  L8_Sig4 w0.381: v3(64.867,67.21) 64.867,63.694 64.682,63.51 64.682,58.488 64.88,58.29 64.932,58.29 67.982,55.24 67.982,54.685 68.763,53.903 69.318,53.903 71.071,52.151 v6(74.778,52.151) ; v6(71.434,49.83) 71.434,49.827 71.284,49.677 71.284,49.349 v2(71.941,48.692)
  L8_Bottom w0.102: v1(62.971,75.899) 62.941,75.869 62.941,69.136 v3(64.867,67.21)
MIPI_DSI_D0P: J3.15 U1.AN18 | length 55.5
  L1_Top w0.089: J3.15@63.441,76.349 63.441,76.099 63.727,75.814 63.727,75.665 63.906,75.486 63.98,75.486 64.158,75.664 64.158,76.749 64.373,76.964 64.399,76.964 64.49,77.055 65.421,77.055 65.727,76.749 65.727,74.193 v3(68.475,71.445) ; v2(69.259,49.445) 68.609,49.445 68.372,49.208 67.772,49.208 67.768,49.205 67.652,49.205 67.566,49.291 67.566,50.175 70.464,53.073 70.464,54.437 69.936,54.966 69.743,54.966 v4(69.509,55.199)
  L3_Sig1 w0.381: v8(65.241,39.049) 65.564,39.049 65.649,38.964 66.064,38.964 66.445,39.344 66.696,39.344 66.89,39.538 v2(66.89,39.549)
  L5_Sig2 w0.381: v9(65.041,38.469) 65.274,38.701 65.274,39.017 v8(65.241,39.049)
  L6_Sig3 w0.381: v6(65.873,35.829) 65.873,36.288 66.052,36.467 66.052,36.888 v6(65.902,37.039)
  L8_Sig4 w0.381: v2(66.89,39.549) v3(66.941,39.549)
  L8_Bottom w0.089: v9(65.041,38.469) 64.98,38.408 64.98,37.877 65.674,37.183 65.757,37.183 v6(65.902,37.039) ; v1(65.192,34.725) 65.194,34.727 65.194,34.94 65.873,35.619 v6(65.873,35.829) ; v3(66.941,39.549) 66.941,39.839 67.452,40.35 67.452,40.897 67.58,41.025 67.58,41.296 67.446,41.431 67.446,41.853 67.509,41.916 67.799,41.916 67.965,42.082 67.965,42.903 67.927,42.942 67.927,43.291 68.161,43.525 68.161,44.456 68.394,44.689 68.402,44.689 68.527,44.814 68.527,46.89 68.756,47.119 68.756,47.456 69.107,47.807 69.107,48.161 68.998,48.27 68.998,48.429 69.27,48.701 69.27,49.434 v2(69.259,49.445) ; v3(68.475,71.445) 69.135,70.785 69.135,63.063 69.556,62.642 69.556,57.526 69.509,57.479 v4(69.509,55.199)
  other v2: 69.509,55.199 68.475,71.445
  other v3: 69.259,49.445 69.509,55.199
  other v4: 69.259,49.445 68.475,71.445
MIPI_DSI_D1N: J3.11 U1.AR18 | length 62.9
  L1_Top w0.089: v4(63.242,32.454) 63.244,32.457 64.415,32.457 64.437,32.434 65.245,32.434 65.313,32.501 65.313,33.176 65.252,33.236 65.252,33.607 65.218,33.64 65.218,33.947 v1(65.216,33.949)
  L1_Top w0.102: U1.AR18@65.041,33.949 v1(65.216,33.949)
  L1_Top w0.254: J3.11@61.441,76.349 v1(61.441,76.799)
  L3_Sig1 w0.381: v2(52.833,52.239) 52.833,52.209 v8(54.174,50.868)
  L5_Sig2 w0.381: v8(54.174,50.868) 54.174,50.758 56.452,48.481 v2(56.452,48.023)
  L6_Sig3 w0.381: v6(54.241,46.09) 55.157,47.006 55.157,47.108 56.072,48.023 v2(56.452,48.023)
  L8_Sig4 w0.381: v3(53.383,45.342) 54.131,46.09 v6(54.241,46.09) ; v3(57.794,74.107) 58.749,74.107 v1(61.441,76.799)
  L8_Bottom w0.089: v2(52.833,52.239) 57.794,57.2 v3(57.794,74.107) ; v3(53.383,45.342) 53.553,45.172 53.553,43.403 53.065,42.915 53.065,39.73 56.331,36.464 56.331,34.857 57.616,33.573 58.224,33.573 58.737,33.06 62.637,33.06 v4(63.242,32.454)
  other v2: 63.242,32.454
  other v3: 63.242,32.454 52.833,52.239
MIPI_DSI_D1P: J3.12 U1.AP18 | length 52.4
  L1_Top w0.102: J3.12@61.941,76.349 61.941,72.908 v4(62.04,72.809) ; v4(62.641,44.827) 62.637,44.823 62.637,44.668 62.468,44.499 62.414,44.499 62.246,44.33 62.246,42.868 62.369,42.745 62.522,42.745 62.641,42.626 62.641,42.472 62.76,42.353 62.905,42.353 62.914,42.345 62.922,42.345 63.041,42.226 63.041,42.072 63.16,41.953 63.322,41.953 63.437,42.068 63.437,42.231 63.551,42.345 63.823,42.345 63.946,42.222 63.946,41.998 64.091,41.853 64.192,41.853 64.337,41.998 64.337,42.222 64.46,42.345 64.623,42.345 64.791,42.176 64.791,42.122 65.004,41.91 v4(65.086,41.91) ; v3(63.623,48.938) 64.401,48.938 v3(64.529,49.066) ; U1.AP18@65.041,34.349 65.041,34.389 64.846,34.585 64.846,34.83 64.969,34.953 65.522,34.953 65.666,35.097 66.017,35.097 66.16,34.953 66.776,34.953 66.968,35.145 v8(66.968,35.182)
  L1_Top w0.254: v1(61.941,75.899) J3.12@61.941,76.349
  L3_Sig1 w0.381: v8(62.512,45.417) 62.641,45.288 v4(62.641,44.827)
  L5_Sig2 w0.381: v8(62.512,45.417) 62.512,45.786 62.895,46.169 v2(62.895,46.554) ; v2(66.145,38.249) 66.081,38.185 66.081,37.041 66.571,36.551 66.628,36.551 66.857,36.321 66.857,36.265 66.968,36.154 v8(66.968,35.182)
  L6_Sig3 w0.381: v2(62.895,46.554) 62.945,46.603 v6(62.945,47.212) ; v6(65.329,40.964) 65.329,39.154 66.106,38.377 66.106,38.288 v2(66.145,38.249)
  L8_Sig4 w0.381: v3(62.678,68.981) 62.678,58.465 v3(63.679,57.464) ; v6(62.945,47.212) 62.945,47.265 v3(64.423,48.743) ; v4(65.086,41.91) 65.086,41.207 v6(65.329,40.964)
  L8_Bottom w0.102: v4(62.04,72.809) 62.678,72.171 v3(62.678,68.981) ; v3(63.623,48.938) 63.732,49.047 63.748,49.047 63.789,49.088 63.789,51.014 64.163,51.387 64.163,52.848 63.679,53.331 v3(63.679,57.464) ; v3(64.423,48.743) 64.529,48.849 v3(64.529,49.066)
  other v2: 65.086,41.91 63.623,48.938 64.529,49.066 62.04,72.809
  other v3: 62.04,72.809
  other v4: 63.623,48.938 64.529,49.066
MIPI_DSI_D2N: J3.5 U1.AR17 | length 54.4
  L1_Top w0.254: J3.5@58.441,76.349 v1(58.441,76.799)
  L5_Sig2 w0.381: v2(62.441,36.918) 63.041,37.518 63.041,38.757 63.257,38.973 63.257,40.212 63.131,40.338 63.041,40.427 v2(63.041,41.8)
  L6_Sig3 w0.381: v6(61.841,46.738) 61.841,47.499 61.776,47.564 61.776,48.238 61.865,48.327 61.996,48.327 62.122,48.453 62.122,48.584 62.656,49.118 v6(62.656,50.402) ; v2(62.441,36.918) 63.063,36.296 v6(63.063,36.124) ; v6(62.986,44.961) 62.989,44.957 62.989,44.647 63.099,44.537 63.099,43.595 63.481,43.213 63.481,43.166 63.733,42.914 63.733,42.141 63.502,41.91 63.308,41.91 63.199,41.8 v2(63.041,41.8)
  L8_Sig4 w0.381: v6(61.841,46.738) 61.841,46.105 62.021,45.925 62.021,45.888 62.314,45.595 62.351,45.595 v6(62.986,44.961) ; v3(62.891,35.649) 62.891,35.952 v6(63.063,36.124) ; v3(63.627,33.268) 63.646,33.268 63.98,32.934 64.972,32.934 v3(65.009,32.971)
  L8_Bottom w0.102: v1(58.441,76.799) 58.562,76.678 59.491,76.678 59.863,77.05 59.992,77.05 60.063,76.979 60.063,76.878 58.025,74.84 58.025,70.378 59.917,68.486 60.079,68.486 61.971,66.595 61.971,57.795 62.656,57.11 62.656,52.006 62.685,51.977 62.685,51.877 62.656,51.848 v6(62.656,50.402) ; v3(62.891,35.649) 62.891,34.504 62.918,34.477 62.918,34.474 62.989,34.403 62.991,34.403 63.038,34.357 63.038,34.347 63.242,34.143 63.242,33.672 63.627,33.287 v3(63.627,33.268) ; v3(65.009,32.971) 65.441,33.403 v3(65.441,33.949)
  other v2: 65.441,33.949
  other v4: 65.441,33.949
MIPI_DSI_D2P: J3.6 U1.AP17 | length 70.6
  L1_Top w0.089: v4(55.495,53.328) 55.495,50.514 v4(55.653,50.356) ; v4(58.156,76.406) 58.156,75.994 58.265,75.885 58.618,75.885 58.727,75.994 58.836,75.994 58.941,76.099 J3.6@58.941,76.349 ; U1.AP17@65.441,34.349 65.441,34.306 65.54,34.207 65.54,34.119 65.631,34.028 65.631,33.903 v4(65.655,33.879)
  L3_Sig1 w0.381: v4(55.495,53.328) 57.698,53.328 58.753,52.273 58.753,51.884 59.614,51.023 v8(59.614,51.012) ; v8(64.476,32.934) 65.066,32.934 65.655,33.522 v4(65.655,33.879)
  L5_Sig2 w0.381: v2(59.432,53.866) 59.432,51.795 59.454,51.773 59.454,51.468 59.614,51.309 v8(59.614,51.012) ; v2(61.129,34.402) 61.129,33.265 61.995,32.399 62.621,32.399 63.033,32.812 63.095,32.874 63.673,32.874 63.873,32.674 64.189,32.674 64.449,32.934 v8(64.476,32.934)
  L6_Sig3 w0.381: v2(59.432,53.866) 60.808,55.242 v6(60.808,57.684) ; v2(61.129,34.402) 60.952,34.579 60.952,34.998 61.54,35.586 v6(61.54,36.004)
  L8_Sig4 w0.381: v3(54.89,43.527) 57.446,40.97 57.446,39.651 61.093,36.004 v6(61.54,36.004) ; v6(60.808,57.684) 61.759,58.635 61.759,68.63 62.711,69.581 v3(62.711,77.583)
  L8_Bottom w0.089: v3(54.89,43.527) 54.481,43.936 54.481,47.869 55.653,49.04 v4(55.653,50.356) ; v4(58.156,76.406) 58.275,76.525 58.275,76.796 59.062,77.583 v3(62.711,77.583)
  other v2: 55.653,50.356 58.156,76.406
  other v3: 55.653,50.356 58.156,76.406
MIPI_DSI_D3N: J3.2 U1.AU18 | length 58.5
  L1_Top w0.102: U1.AU18@65.041,33.149 65.07,33.121 65.07,32.677 v4(65.197,32.549)
  L1_Top w0.254: v1(56.941,75.899) J3.2@56.941,76.349 ; U1.AU18@65.041,33.149 v1(65.041,33.277)
  L3_Sig1 w0.381: v8(59.271,34.217) 60.967,32.52 61.874,32.52 61.995,32.399 62.458,32.399 62.944,32.886 63.407,32.886 64.19,32.102 64.751,32.102 v4(65.197,32.549)
  L5_Sig2 w0.381: v9(48.433,50.765) 50.783,48.415 51.067,48.415 58.119,41.363 58.119,40.915 59.271,39.763 v8(59.271,34.217)
  L8_Bottom w0.102: v9(48.433,50.765) 48.433,67.391 v1(56.941,75.899)